# EAGLE board panel (EAGLE 5.09)
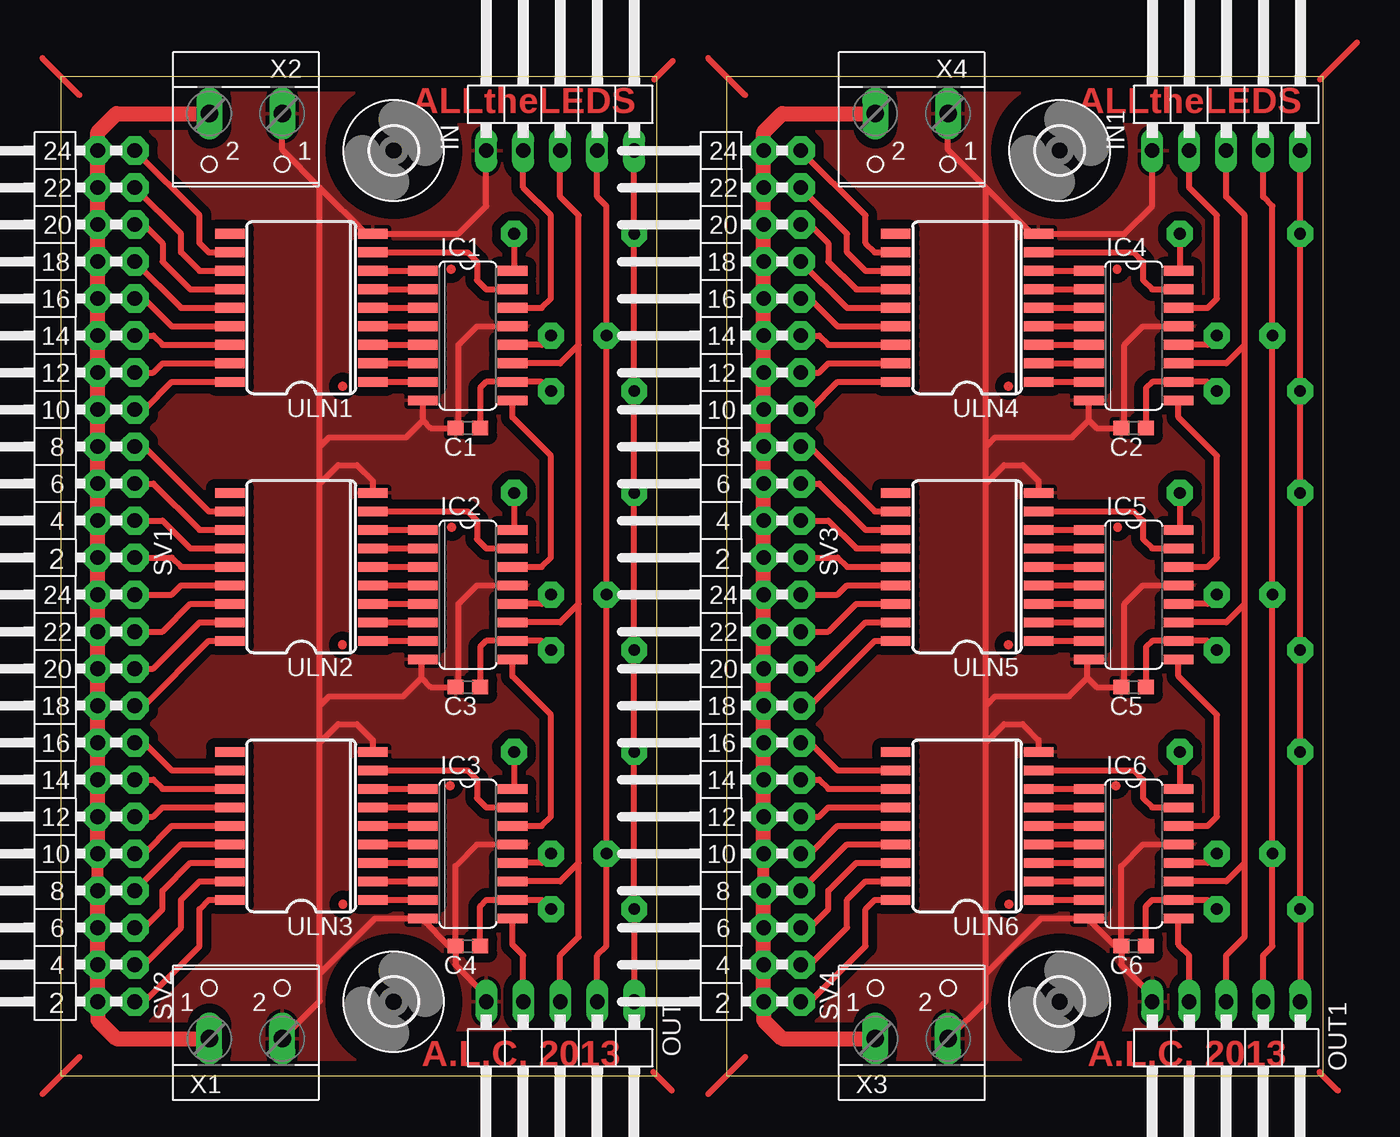
[diagram p0: board, top side]
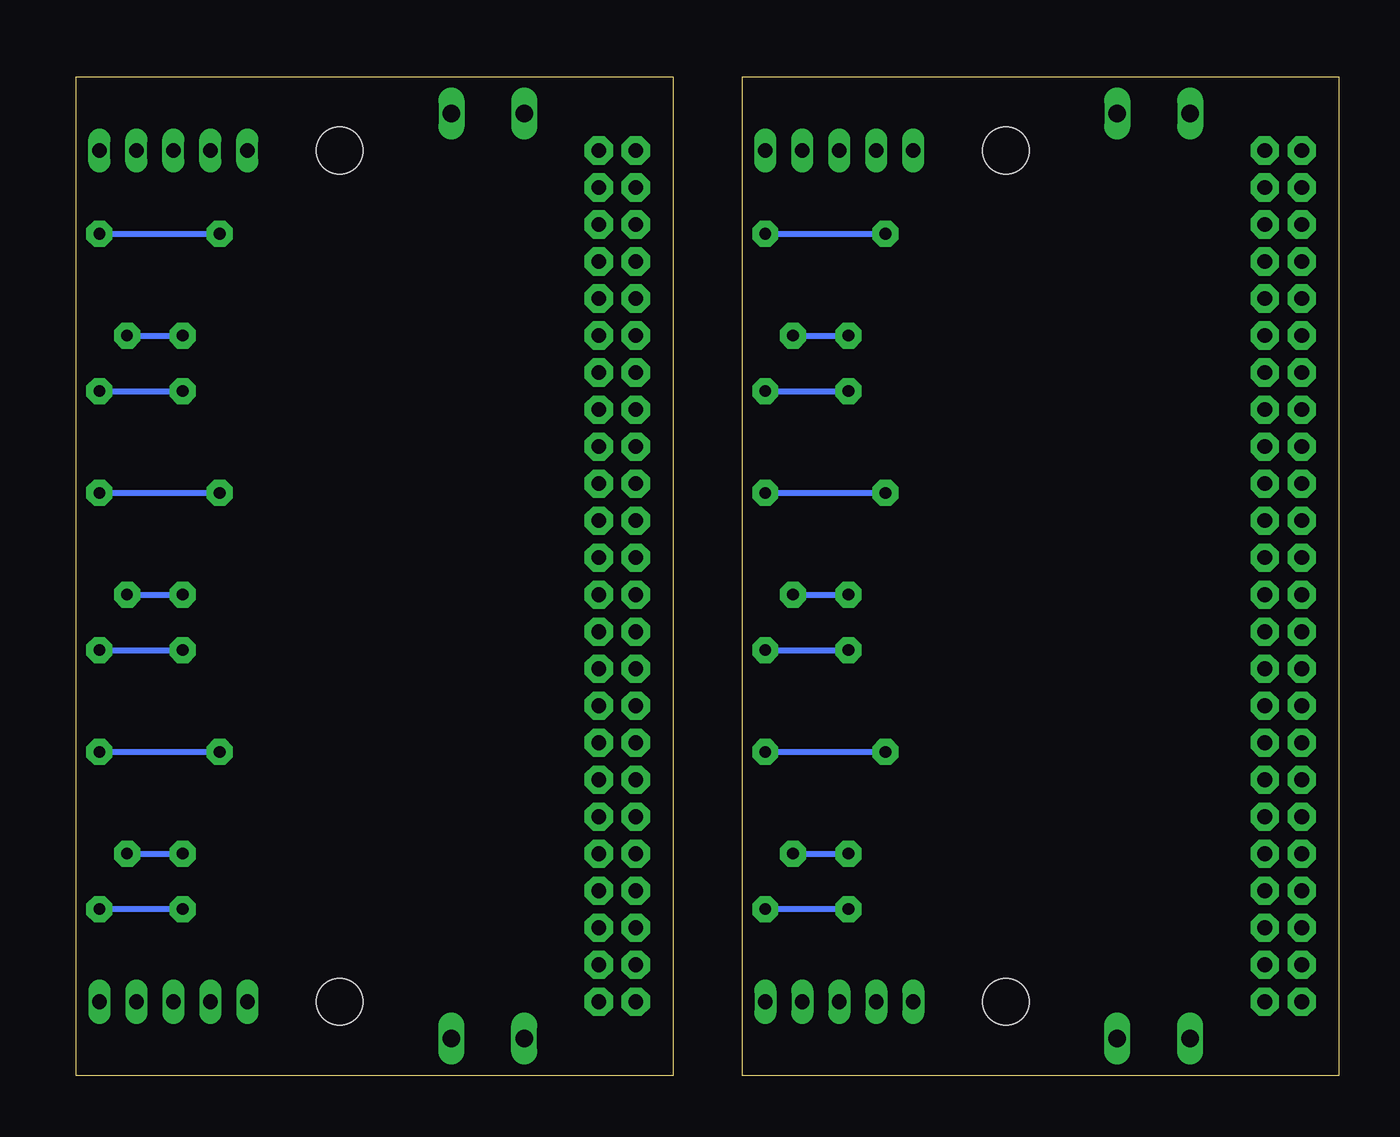
[diagram p1: board, bottom side, seen from below]

Size 86.67 x 68.57 mm. Coordinates in mm from the lower left corner, seen from the top.
Outline: 0,0 40.95,0 40.95,68.57 0,68.57 0,0
Outline: 45.72,0 86.67,0 86.67,68.57 45.72,68.57 45.72,0
Copper layers (1*16): Top 0.035mm / dielectric 1.5mm / Bottom 0.035mm
Design rules "default": minimum track width 10mil, minimum drill 24mil, track to track 8mil, track to pad 8mil, pad to pad 8mil, via to via 8mil, smd to smd 8mil, copper to edge 40mil, drill to drill 8mil, minimum pad ring 10mil, minimum via ring 8mil, stop-mask expansion 4mil, vias tented up to drill 0mil, thermal gap 10mil

## Footprints (pad centres in the part's own frame; a part is rotated, then mirrored left to right if it is on the bottom)
C0603 = smd 1.1 x 1: 1 -0.85,0; 2 0.85,0
3,2 = hole 3.2: 0,0
SO16 = smd 0.66 x 2.032: 1 -4.445,-3.073; 2 -3.175,-3.073; 3 -1.905,-3.073; 4 -0.635,-3.073; 5 0.635,-3.073; 6 1.905,-3.073; 7 3.175,-3.073; 8 4.445,-3.073; 9 4.445,3.073; 10 3.175,3.073; 11 1.905,3.073; 12 0.635,3.073; 13 -0.635,3.073; 14 -1.905,3.073; 15 -3.175,3.073; 16 -4.445,3.073
1X05/90 = drill 1.016 long: 1 -5.08,-3.81; 2 -2.54,-3.81; 3 0,-3.81; 4 2.54,-3.81; 5 5.08,-3.81
MA12-2W = drill 1.016 pad 1.93 octagon: 1 -13.97,-1.27; 2 -13.97,1.27; 3 -11.43,-1.27; 4 -11.43,1.27; 5 -8.89,-1.27; 6 -8.89,1.27; 7 -6.35,-1.27; 8 -6.35,1.27; 9 -3.81,-1.27; 10 -3.81,1.27; 11 -1.27,-1.27; 12 -1.27,1.27; 13 1.27,-1.27; 14 1.27,1.27; 15 3.81,-1.27; 16 3.81,1.27; 17 6.35,-1.27; 18 6.35,1.27; 19 8.89,-1.27; 20 8.89,1.27; 21 11.43,-1.27; 22 11.43,1.27; 23 13.97,-1.27; 24 13.97,1.27
SO18L = smd 0.66 x 2.032: 1 -0.635,-4.902; 2 0.635,-4.902; 3 1.905,-4.902; 4 3.175,-4.902; 5 4.445,-4.902; 6 5.715,-4.902; 7 6.985,-4.902; 8 8.255,-4.902; 9 9.525,-4.902; 10 9.525,4.902; 11 8.255,4.902; 12 6.985,4.902; 13 5.715,4.902; 14 4.445,4.902; 15 3.175,4.902; 16 1.905,4.902; 17 0.635,4.902; 18 -0.635,4.902
W237-102 = drill 1.194 long: 1 -2.5,-1.27; 2 2.5,-1.27

## Placement (x,y rotation side)
C1  100nF  [C0603]  27.94,44.45 180 top
C2  100nF  [C0603]  73.66,44.45 180 top
C3  100nF  [C0603]  27.94,26.67 180 top
C4  100nF  [C0603]  27.94,8.89 180 top
C5  100nF  [C0603]  73.66,26.67 180 top
C6  100nF  [C0603]  73.66,8.89 180 top
H1  MOUNT-HOLE3.2  [3,2]  22.86,5.08 0 top
H2  MOUNT-HOLE3.2  [3,2]  22.86,63.5 0 top
H3  MOUNT-HOLE3.2  [3,2]  68.58,5.08 0 top
H4  MOUNT-HOLE3.2  [3,2]  68.58,63.5 0 top
IC1  74HC595D  [SO16]  27.94,50.8 270 top
IC2  74HC595D  [SO16]  27.94,33.02 270 top
IC3  74HC595D  [SO16]  27.94,15.24 270 top
IC4  74HC595D  [SO16]  73.66,50.8 270 top
IC5  74HC595D  [SO16]  73.66,33.02 270 top
IC6  74HC595D  [SO16]  73.66,15.24 270 top
IN  [1X05/90]  34.29,67.31 0 top
IN1  [1X05/90]  80.01,67.31 0 top
OUT  [1X05/90]  34.29,1.27 180 top
OUT1  [1X05/90]  80.01,1.27 180 top
SV1  [MA12-2W]  3.81,49.53 90 top
SV2  [MA12-2W]  3.81,19.05 90 top
SV3  [MA12-2W]  49.53,49.53 90 top
SV4  [MA12-2W]  49.53,19.05 90 top
ULN1  [SO18L]  16.51,48.26 90 top
ULN2  [SO18L]  16.51,30.48 90 top
ULN3  [SO18L]  16.51,12.7 90 top
ULN4  [SO18L]  62.23,48.26 90 top
ULN5  [SO18L]  62.23,30.48 90 top
ULN6  [SO18L]  62.23,12.7 90 top
X1  [W237-102]  12.7,3.81 0 top
X2  [W237-102]  12.7,64.77 180 top
X3  [W237-102]  58.42,3.81 0 top
X4  [W237-102]  58.42,64.77 180 top

## Library data of the parts
C1-C6 = rcl
H1-H4 = holes
IC1-IC6 = 74xx-eu
IN IN1 OUT OUT1 = pinhead
SV1-SV4 = con-lstb
ULN1-ULN6 = SparkFun
X1-X4 = con-wago-500

## Nets
CLOCK: IC1.11 IC2.11 IC3.11 IN.3 OUT.3
CLOCK1: IC4.11 IC5.11 IC6.11 IN1.3 OUT1.3
DATA_IN: IC1.14 IN.2
DATA_IN1: IC4.14 IN1.2
DATA_OUT: IC3.9 OUT.4
DATA_OUT1: IC6.9 OUT1.4
GND: C1.2 C3.2 C4.2 IC1.8 IC1.13 IC2.8 IC2.13 IC3.8 IC3.13 IN.1 OUT.5 ULN1.9 ULN2.9 ULN3.9 X1.2 X2.1
GND1: C2.2 C5.2 C6.2 IC4.8 IC4.13 IC5.8 IC5.13 IC6.8 IC6.13 IN1.1 OUT1.5 ULN4.9 ULN5.9 ULN6.9 X3.2 X4.1
LATCH: IC1.12 IC2.12 IC3.12 IN.4 OUT.2
LATCH1: IC4.12 IC5.12 IC6.12 IN1.4 OUT1.2
N$1: IC1.15 ULN1.8
N$2: IC1.1 ULN1.7
N$3: IC1.2 ULN1.6
N$4: IC1.3 ULN1.5
N$5: IC1.4 ULN1.4
N$6: IC1.5 ULN1.3
N$7: IC1.6 ULN1.2
N$8: IC1.7 ULN1.1
N$9: IC2.15 ULN2.8
N$10: IC2.1 ULN2.7
N$11: IC2.2 ULN2.6
N$12: IC2.3 ULN2.5
N$13: IC2.4 ULN2.4
N$14: IC2.5 ULN2.3
N$15: IC2.6 ULN2.2
N$16: IC2.7 ULN2.1
N$17: IC3.15 ULN3.8
N$18: IC3.1 ULN3.7
N$19: IC3.2 ULN3.6
N$20: IC3.3 ULN3.5
N$21: IC3.4 ULN3.4
N$22: IC3.5 ULN3.3
N$23: IC3.6 ULN3.2
N$24: IC3.7 ULN3.1
N$25: IC2.9 IC3.14
N$26: IC1.9 IC2.14
N$27: SV1.23 ULN1.11
N$28: SV1.21 ULN1.12
N$29: SV1.19 ULN1.13
N$30: SV1.17 ULN1.14
N$31: SV1.15 ULN1.15
N$32: SV1.13 ULN1.16
N$33: SV1.11 ULN1.17
N$34: SV1.9 ULN1.18
N$35: SV1.1 ULN2.14
N$36: SV1.7 ULN2.11
N$37: SV1.5 ULN2.12
N$38: SV1.3 ULN2.13
N$39: SV2.1 ULN3.18
N$40: SV2.3 ULN3.17
N$41: SV2.5 ULN3.16
N$42: SV2.7 ULN3.15
N$43: SV2.9 ULN3.14
N$44: SV2.11 ULN3.13
N$45: SV2.13 ULN3.12
N$46: SV2.15 ULN3.11
N$47: SV2.17 ULN2.18
N$48: SV2.19 ULN2.17
N$49: SV2.21 ULN2.16
N$50: SV2.23 ULN2.15
N$57: IC4.15 ULN4.8
N$58: IC4.1 ULN4.7
N$59: IC4.2 ULN4.6
N$60: IC4.3 ULN4.5
N$61: IC4.5 ULN4.3
N$62: IC4.6 ULN4.2
N$63: IC4.7 ULN4.1
N$64: IC5.15 ULN5.8
N$65: IC5.1 ULN5.7
N$66: IC5.2 ULN5.6
N$67: IC5.3 ULN5.5
N$68: IC5.4 ULN5.4
N$69: IC5.5 ULN5.3
N$70: IC5.6 ULN5.2
N$71: IC5.7 ULN5.1
N$72: IC6.15 ULN6.8
N$73: IC6.1 ULN6.7
N$74: IC6.2 ULN6.6
N$75: IC6.3 ULN6.5
N$76: IC6.4 ULN6.4
N$77: IC6.5 ULN6.3
N$78: IC6.6 ULN6.2
N$79: IC6.7 ULN6.1
N$80: IC5.9 IC6.14
N$81: IC4.9 IC5.14
N$82: SV3.23 ULN4.11
N$83: SV3.21 ULN4.12
N$84: SV3.19 ULN4.13
N$85: SV3.17 ULN4.14
N$86: SV3.15 ULN4.15
N$87: SV3.13 ULN4.16
N$88: SV3.11 ULN4.17
N$89: SV3.9 ULN4.18
N$90: SV3.7 ULN5.11
N$91: SV3.5 ULN5.12
N$92: SV3.3 ULN5.13
N$93: SV3.1 ULN5.14
N$94: SV4.1 ULN6.18
N$95: SV4.3 ULN6.17
N$96: SV4.5 ULN6.16
N$97: SV4.7 ULN6.15
N$98: SV4.9 ULN6.14
N$99: SV4.11 ULN6.13
N$100: SV4.13 ULN6.12
N$101: SV4.15 ULN6.11
N$102: SV4.17 ULN5.18
N$103: SV4.19 ULN5.17
N$104: SV4.21 ULN5.16
N$105: SV4.23 ULN5.15
N$106: IC4.4 ULN4.4
VCC: C1.1 C3.1 C4.1 IC1.10 IC1.16 IC2.10 IC2.16 IC3.10 IC3.16 IN.5 OUT.1
VCC1: C2.1 C5.1 C6.1 IC4.10 IC4.16 IC5.10 IC5.16 IC6.10 IC6.16 IN1.5 OUT1.1
VSS: SV1.2 SV1.4 SV1.6 SV1.8 SV1.10 SV1.12 SV1.14 SV1.16 SV1.18 SV1.20 SV1.22 SV1.24 SV2.2 SV2.4 SV2.6 SV2.8 SV2.10 SV2.12 SV2.14 SV2.16 SV2.18 SV2.20 SV2.22 SV2.24 X1.1 X2.2
VSS1: SV3.2 SV3.4 SV3.6 SV3.8 SV3.10 SV3.12 SV3.14 SV3.16 SV3.18 SV3.20 SV3.22 SV3.24 SV4.2 SV4.4 SV4.6 SV4.8 SV4.10 SV4.12 SV4.14 SV4.16 SV4.18 SV4.20 SV4.22 SV4.24 X3.1 X4.2

## Tracks (layer width: path | path; a pad name or v marks a point on that pad's centre or on a via)
CLOCK
  Top 0.406: OUT.3 34.29,8.26 35.56,9.53 35.56,14.61 | IC3.11 34.29,13.34 35.56,14.61 | IN.3 34.29,60.32 35.56,59.05 35.56,50.16 | 35.56,50.16 34.29,48.89 IC1.11 | 35.56,32.38 35.56,50.16 | 35.56,32.38 34.29,31.11 IC2.11 | 35.56,14.61 35.56,32.38
CLOCK1
  Top 0.406: OUT1.3 80.01,8.26 81.28,9.53 81.28,14.61 | IC6.11 80.01,13.34 81.28,14.61 | IN1.3 80.01,60.32 81.28,59.05 81.28,50.16 | 81.28,50.16 80.01,48.89 IC4.11 | 81.28,32.38 81.28,50.16 | 81.28,32.38 80.01,31.11 IC5.11 | 81.28,14.61 81.28,32.38
DATA_IN
  Top 0.406: IC1.14 33.02,52.7 33.65,53.34 33.65,59.05 31.75,60.96 IN.2
DATA_IN1
  Top 0.406: IC4.14 78.74,52.7 79.38,53.34 79.38,59.05 77.47,60.96 IN1.2
DATA_OUT
  Top 0.406: IC3.9 31.01,8.99 31.75,8.26 OUT.4
DATA_OUT1
  Top 0.406: IC6.9 76.73,8.99 77.47,8.26 OUT1.4
GND
  Top 0.406: 24.87,44.98 IC1.8 | 24.87,44.98 25.4,44.45 C1.2 27.3,44.66 27.3,50.16 28.57,51.43 IC1.13 | 17.78,43.18 18.41,43.81 23.7,43.81 24.87,44.98 | ULN2.9 21.41,40.82 20.32,41.91 19.05,41.91 17.78,40.64 | 17.78,25.4 17.78,40.64 | 17.78,25.4 18.41,26.04 23.5,26.04 24.77,27.3 | 24.77,27.3 24.77,28.47 IC2.8 | 24.77,27.3 25.4,26.67 C3.2 27.3,26.89 27.3,32.38 28.57,33.65 IC2.13 | 17.78,40.64 17.78,43.18 | ULN3.9 21.41,23.04 20.32,24.13 19.05,24.13 17.78,22.86 | 17.78,22.86 17.78,25.4 | IC3.13 28.57,15.88 27.09,14.39 C4.2 | C4.2 27.09,7.62 29.21,5.5 OUT.5 | X2.1 15.2,63.54 17.78,60.96 | 17.78,6.99 17.78,5.12 X1.2 | 17.78,6.99 17.78,22.86 | IN.1 29.21,59.69 27.3,57.78 ULN1.9 20.96,57.78 17.78,60.96 | 17.78,43.18 17.78,60.96 | C4.2 26.67,8.89 24.87,10.69 IC3.8 21.59,10.79 17.78,6.99
  pour Top (isolate 0.61): 0,68.58 40.64,68.58 40.64,0 0,0
GND1
  Top 0.406: 70.59,44.98 IC4.8 | 70.59,44.98 71.12,44.45 C2.2 73.03,44.66 73.03,50.16 74.3,51.43 IC4.13 | 63.5,43.18 64.14,43.81 69.42,43.81 70.59,44.98 | ULN5.9 67.13,40.82 66.04,41.91 64.77,41.91 63.5,40.64 | 63.5,25.4 63.5,40.64 | 63.5,25.4 64.14,26.04 69.22,26.04 70.48,27.3 | 70.48,27.3 70.48,28.47 IC5.8 | 70.48,27.3 71.12,26.67 C5.2 73.03,26.89 73.03,32.38 74.3,33.65 IC5.13 | 63.5,40.64 63.5,43.18 | ULN6.9 67.13,23.04 66.04,24.13 64.77,24.13 63.5,22.86 | 63.5,22.86 63.5,25.4 | IC6.13 74.3,15.88 72.81,14.39 C6.2 | C6.2 72.81,7.62 74.93,5.5 OUT1.5 | X4.1 60.92,63.54 63.5,60.96 | 63.5,6.99 63.5,5.12 X3.2 | 63.5,6.99 63.5,22.86 | IN1.1 74.93,59.69 73.03,57.78 ULN4.9 66.67,57.78 63.5,60.96 | 63.5,43.18 63.5,60.96 | C6.2 72.39,8.89 70.59,10.69 IC6.8 67.31,10.79 63.5,6.99
  pour Top (isolate 0.61): 45.72,68.58 86.36,68.58 86.36,0 45.72,0
LATCH  (via drill 0.8 pad 1.78)
  Top 0.406: IN.4 36.83,60.32 37.46,59.69 v37.46,50.8 v37.46,33.02 v37.46,15.24 37.46,8.89 36.83,8.26 OUT.2 | IC1.12 33.02,50.16 v33.65,50.8 | IC2.12 33.02,32.38 v33.65,33.02 | IC3.12 33.02,14.61 v33.65,15.24
  Bottom 0.406: v37.46,50.8 v33.65,50.8 | v37.46,33.02 v33.65,33.02 | v37.46,15.24 v33.65,15.24
LATCH1  (via drill 0.8 pad 1.78)
  Top 0.406: IN1.4 82.55,60.32 83.19,59.69 v83.19,50.8 v83.19,33.02 v83.19,15.24 83.19,8.89 82.55,8.26 OUT1.2 | IC4.12 78.74,50.16 v79.38,50.8 | IC5.12 78.74,32.38 v79.38,33.02 | IC6.12 78.74,14.61 v79.38,15.24
  Bottom 0.406: v83.19,50.8 v79.38,50.8 | v83.19,33.02 v79.38,33.02 | v83.19,15.24 v79.38,15.24
N$1
  Top 0.406: IC1.15 29.21,53.97 28.57,54.61 28.57,55.88 27.94,56.51 ULN1.8
N$2
  Top 0.406: ULN1.7 IC1.1
N$3
  Top 0.406: ULN1.6 IC1.2
N$4
  Top 0.406: ULN1.5 IC1.3
N$5
  Top 0.406: ULN1.4 IC1.4
N$6
  Top 0.406: ULN1.3 IC1.5
N$7
  Top 0.406: ULN1.2 IC1.6
N$8
  Top 0.406: ULN1.1 IC1.7
N$9
  Top 0.406: IC2.15 29.21,36.2 28.57,36.83 28.57,38.1 27.94,38.73 ULN2.8
N$10
  Top 0.406: ULN2.7 IC2.1
N$11
  Top 0.406: ULN2.6 IC2.2
N$12
  Top 0.406: ULN2.5 IC2.3
N$13
  Top 0.406: ULN2.4 IC2.4
N$14
  Top 0.406: ULN2.3 IC2.5
N$15
  Top 0.406: ULN2.2 IC2.6
N$16
  Top 0.406: ULN2.1 IC2.7
N$17
  Top 0.406: ULN3.8 27.94,20.96 28.57,20.32 28.57,19.05 29.21,18.41 IC3.15
N$18
  Top 0.406: ULN3.7 IC3.1
N$19
  Top 0.406: ULN3.6 IC3.2
N$20
  Top 0.406: ULN3.5 IC3.3
N$21
  Top 0.406: ULN3.4 IC3.4
N$22
  Top 0.406: ULN3.3 IC3.5
N$23
  Top 0.406: ULN3.2 IC3.6
N$24
  Top 0.406: ULN3.1 IC3.7
N$25
  Top 0.406: IC2.9 31.01,27.41 33.65,24.77 33.65,17.78 33.02,17.14 IC3.14
N$26
  Top 0.406: IC1.9 31.01,45.19 33.65,42.54 33.65,35.56 33.02,34.92 IC2.14
N$27
  Top 0.406: SV1.23 9.53,59.05 9.53,57.15 10.16,56.51 ULN1.11
N$28
  Top 0.406: SV1.21 8.26,57.78 8.26,56.51 9.53,55.24 ULN1.12
N$29
  Top 0.406: SV1.19 5.71,58.42 6.99,57.15 6.99,55.88 8.89,53.97 ULN1.13
N$30
  Top 0.406: SV1.17 8.26,52.7 ULN1.14
N$31
  Top 0.406: SV1.15 5.71,53.34 7.62,51.43 ULN1.15
N$32
  Top 0.406: SV1.13 6.35,50.8 6.99,50.16 ULN1.16
N$33
  Top 0.406: SV1.11 6.35,48.26 6.99,48.89 ULN1.17
N$34
  Top 0.406: SV1.9 5.71,45.72 7.62,47.62 ULN1.18
N$35
  Top 0.406: SV1.1 7.62,35.56 8.26,34.92 ULN2.14
N$36
  Top 0.406: ULN2.11 10.16,38.73 5.71,43.18 SV1.7
N$37
  Top 0.406: ULN2.12 9.53,37.46 6.35,40.64 SV1.5
N$38
  Top 0.406: ULN2.13 8.89,36.2 6.99,38.1 SV1.3
N$39
  Top 0.406: ULN3.18 10.16,12.07 9.53,11.43 9.53,8.89 5.71,5.08 SV2.1
N$40
  Top 0.406: ULN3.17 9.53,13.34 8.26,12.07 8.26,10.16 5.71,7.62 SV2.3
N$41
  Top 0.406: ULN3.16 8.89,14.61 6.99,12.7 6.99,11.43 5.71,10.16 SV2.5
N$42
  Top 0.406: SV2.7 8.26,15.88 ULN3.15
N$43
  Top 0.406: ULN3.14 7.62,17.14 5.71,15.24 SV2.9
N$44
  Top 0.406: SV2.11 6.35,17.78 6.99,18.41 ULN3.13
N$45
  Top 0.406: ULN3.12 6.99,19.68 6.35,20.32 SV2.13
N$46
  Top 0.406: SV2.15 5.71,22.86 7.62,20.96 ULN3.11
N$47
  Top 0.406: ULN2.18 10.16,29.84 5.71,25.4 SV2.17
N$48
  Top 0.406: ULN2.17 9.53,31.11 6.35,27.94 SV2.19
N$49
  Top 0.406: ULN2.16 8.89,32.38 6.99,30.48 SV2.21
N$50
  Top 0.406: SV2.23 7.62,33.02 8.26,33.65 ULN2.15
N$51  (via drill 0.6)
  other vias: 22.86,5.08
N$52  (via drill 0.6)
  other vias: 22.86,63.5
N$53
  Top 0.406: -1.27,69.85 1.27,67.31
N$54
  Top 0.406: 40.75,68.38 42.02,69.65
N$55
  Top 0.406: -1.27,-1.27 1.27,1.27
N$56
  Top 0.406: 40.69,0.25 41.96,-1.02
N$57
  Top 0.406: IC4.15 74.93,53.97 74.3,54.61 74.3,55.88 73.66,56.51 ULN4.8
N$58
  Top 0.406: ULN4.7 IC4.1
N$59
  Top 0.406: ULN4.6 IC4.2
N$60
  Top 0.406: ULN4.5 IC4.3
N$61
  Top 0.406: ULN4.3 IC4.5
N$62
  Top 0.406: ULN4.2 IC4.6
N$63
  Top 0.406: ULN4.1 IC4.7
N$64
  Top 0.406: IC5.15 74.93,36.2 74.3,36.83 74.3,38.1 73.66,38.73 ULN5.8
N$65
  Top 0.406: ULN5.7 IC5.1
N$66
  Top 0.406: ULN5.6 IC5.2
N$67
  Top 0.406: ULN5.5 IC5.3
N$68
  Top 0.406: ULN5.4 IC5.4
N$69
  Top 0.406: ULN5.3 IC5.5
N$70
  Top 0.406: ULN5.2 IC5.6
N$71
  Top 0.406: ULN5.1 IC5.7
N$72
  Top 0.406: ULN6.8 73.66,20.96 74.3,20.32 74.3,19.05 74.93,18.41 IC6.15
N$73
  Top 0.406: ULN6.7 IC6.1
N$74
  Top 0.406: ULN6.6 IC6.2
N$75
  Top 0.406: ULN6.5 IC6.3
N$76
  Top 0.406: ULN6.4 IC6.4
N$77
  Top 0.406: ULN6.3 IC6.5
N$78
  Top 0.406: ULN6.2 IC6.6
N$79
  Top 0.406: ULN6.1 IC6.7
N$80
  Top 0.406: IC5.9 76.73,27.41 79.38,24.77 79.38,17.78 78.74,17.14 IC6.14
N$81
  Top 0.406: IC4.9 76.73,45.19 79.38,42.54 79.38,35.56 78.74,34.92 IC5.14
N$82
  Top 0.406: SV3.23 55.24,59.05 55.24,57.15 55.88,56.51 ULN4.11
N$83
  Top 0.406: SV3.21 53.97,57.78 53.97,56.51 55.24,55.24 ULN4.12
N$84
  Top 0.406: SV3.19 51.43,58.42 52.7,57.15 52.7,55.88 54.61,53.97 ULN4.13
N$85
  Top 0.406: SV3.17 53.97,52.7 ULN4.14
N$86
  Top 0.406: SV3.15 51.43,53.34 53.34,51.43 ULN4.15
N$87
  Top 0.406: SV3.13 52.07,50.8 52.7,50.16 ULN4.16
N$88
  Top 0.406: SV3.11 52.07,48.26 52.7,48.89 ULN4.17
N$89
  Top 0.406: SV3.9 51.43,45.72 53.34,47.62 ULN4.18
N$90
  Top 0.406: ULN5.11 55.88,38.73 51.43,43.18 SV3.7
N$91
  Top 0.406: ULN5.12 55.24,37.46 52.07,40.64 SV3.5
N$92
  Top 0.406: ULN5.13 54.61,36.2 52.7,38.1 SV3.3
N$93
  Top 0.406: SV3.1 53.34,35.56 53.97,34.92 ULN5.14
N$94
  Top 0.406: ULN6.18 55.88,12.07 55.24,11.43 55.24,8.89 51.43,5.08 SV4.1
N$95
  Top 0.406: ULN6.17 55.24,13.34 53.97,12.07 53.97,10.16 51.43,7.62 SV4.3
N$96
  Top 0.406: ULN6.16 54.61,14.61 52.7,12.7 52.7,11.43 51.43,10.16 SV4.5
N$97
  Top 0.406: SV4.7 53.97,15.88 ULN6.15
N$98
  Top 0.406: ULN6.14 53.34,17.14 51.43,15.24 SV4.9
N$99
  Top 0.406: SV4.11 52.07,17.78 52.7,18.41 ULN6.13
N$100
  Top 0.406: ULN6.12 52.7,19.68 52.07,20.32 SV4.13
N$101
  Top 0.406: SV4.15 51.43,22.86 53.34,20.96 ULN6.11
N$102
  Top 0.406: ULN5.18 55.88,29.84 51.43,25.4 SV4.17
N$103
  Top 0.406: ULN5.17 55.24,31.11 52.07,27.94 SV4.19
N$104
  Top 0.406: ULN5.16 54.61,32.38 52.7,30.48 SV4.21
N$105
  Top 0.406: SV4.23 53.34,33.02 53.97,33.65 ULN5.15
N$106
  Top 0.406: ULN4.4 IC4.4
N$107  (via drill 0.6)
  other vias: 68.58,5.08
N$108  (via drill 0.6)
  other vias: 68.58,63.5
N$109
  Top 0.406: 44.45,69.85 46.99,67.31
N$110
  Top 0.406: 86.47,68.38 89.01,70.92
N$111
  Top 0.406: 44.45,-1.27 46.99,1.27
N$112
  Top 0.406: 86.41,0.25 87.68,-1.02
VCC  (via drill 0.8 pad 1.78)
  Top 0.406: C1.1 28.79,47.2 29.21,47.62 IC1.10 33.02,47.62 v33.65,46.99 | C3.1 28.79,29.43 29.21,29.84 IC2.10 33.02,29.84 v33.65,29.21 | IN.5 v39.37,57.78 v39.37,46.99 v39.37,40 v39.37,29.21 v39.37,22.23 v39.37,11.43 OUT.1 | C4.1 28.79,11.64 29.21,12.07 IC3.10 33.02,12.07 v33.65,11.43 | v31.11,57.78 31.11,55.35 IC1.16 | v31.11,40 31.11,37.57 IC2.16 | v31.11,22.23 31.11,19.79 IC3.16
  Bottom 0.406: v39.37,57.78 v31.11,57.78 | v39.37,40 v31.11,40 | v39.37,46.99 v33.65,46.99 | v39.37,22.23 v31.11,22.23 | v39.37,29.21 v33.65,29.21 | v33.65,11.43 v39.37,11.43
VCC1  (via drill 0.8 pad 1.78)
  Top 0.406: C2.1 74.51,47.2 74.93,47.62 IC4.10 78.74,47.62 v79.38,46.99 | C5.1 74.51,29.43 74.93,29.84 IC5.10 78.74,29.84 v79.38,29.21 | IN1.5 v85.09,57.78 v85.09,46.99 v85.09,40 v85.09,29.21 v85.09,22.23 v85.09,11.43 OUT1.1 | C6.1 74.51,11.64 74.93,12.07 IC6.10 78.74,12.07 v79.38,11.43 | v76.84,57.78 76.84,55.35 IC4.16 | v76.84,40 76.84,37.57 IC5.16 | v76.84,22.23 76.84,19.79 IC6.16
  Bottom 0.406: v85.09,57.78 v76.84,57.78 | v85.09,40 v76.84,40 | v85.09,46.99 v79.38,46.99 | v85.09,22.23 v76.84,22.23 | v85.09,29.21 v79.38,29.21 | v79.38,11.43 v85.09,11.43
VSS
  Top 0.813: SV2.8 SV2.10
  Top 1.016: SV2.10 SV2.12 SV2.14 SV2.16 SV2.18 SV2.20 SV2.22 SV2.24 SV1.2 SV1.4 SV1.6 SV1.8 SV1.10 SV1.12 SV1.14 SV1.16 SV1.18 SV1.20 SV1.22 SV1.24 2.54,64.77 3.81,66.04 X2.2 | SV2.8 SV2.6 SV2.4 SV2.2 2.54,3.81 3.81,2.54 X1.1
VSS1
  Top 0.813: SV4.8 SV4.10
  Top 1.016: SV4.10 SV4.12 SV4.14 SV4.16 SV4.18 SV4.20 SV4.22 SV4.24 SV3.2 SV3.4 SV3.6 SV3.8 SV3.10 SV3.12 SV3.14 SV3.16 SV3.18 SV3.20 SV3.22 SV3.24 48.26,64.77 49.53,66.04 X4.2 | SV4.8 SV4.6 SV4.4 SV4.2 48.26,3.81 49.53,2.54 X3.1
(copper drawn outside any net)
  shapes: Top circle x12

## Text on the board
Top: ALLtheLEDS | ALLtheLEDS | A.L.C. 2013 | A.L.C. 2013